# Altium PCB Adafruit MicroLipo Charger v2.PcbDoc
Units mil, origin at the board's own origin, x right, y up, seen from the top; angles counter-clockwise.
Board outline 1195 x 475 mil, 2 copper layers (Top, Bottom); 27 components, 9 nets, 38 pads, 12 vias.
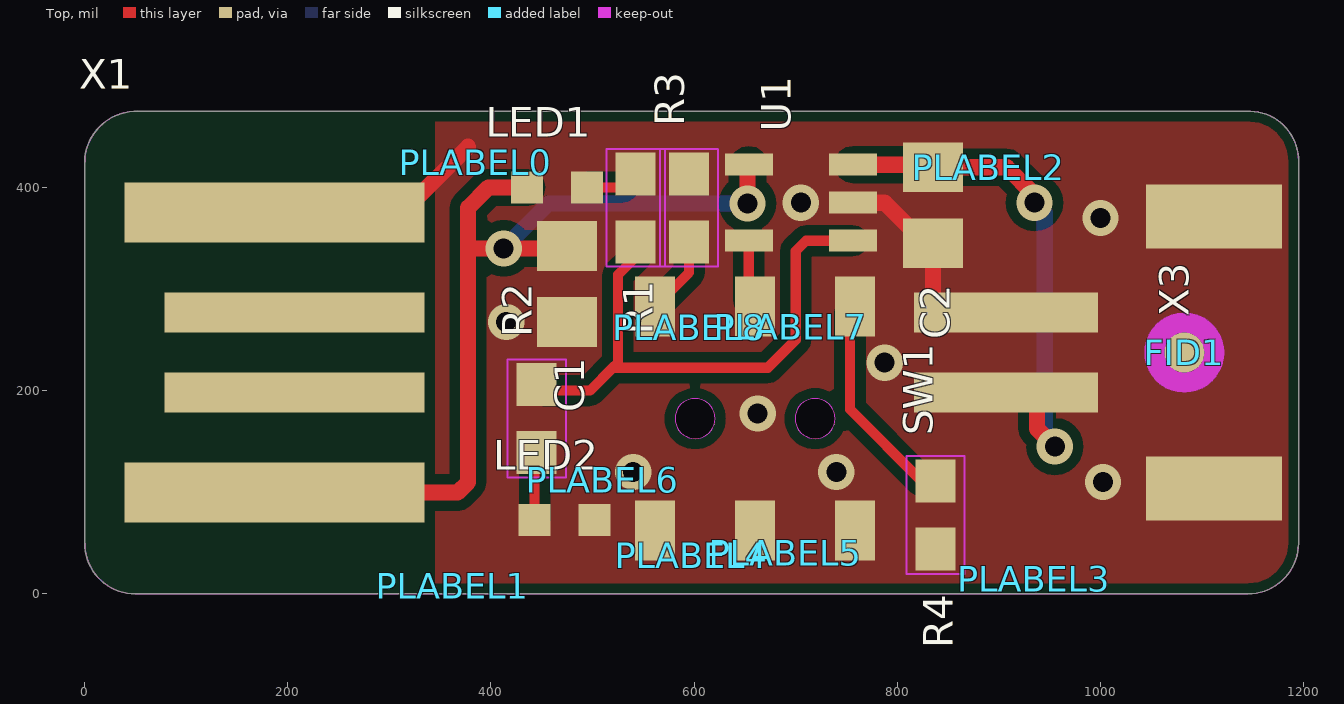
[diagram p0: Top view]
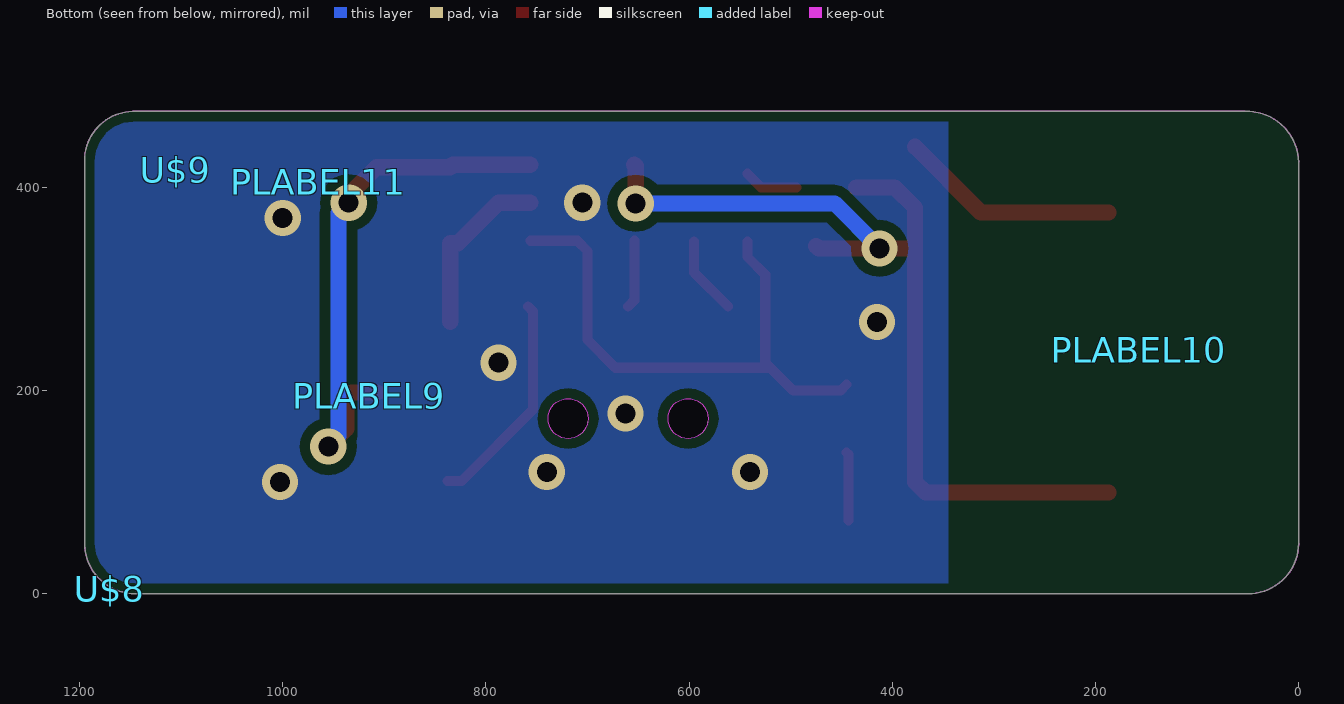
[diagram p1: Bottom view, seen from below]

## Layer stack, top to bottom
Top Solder: solder mask 0.4, Solder Resist, Dk 3.5
Top: signal copper 1.378
Dielectric 1: dielectric 12.6, FR-4, Dk 4.8
Bottom: signal copper 1.378
Bottom Solder: solder mask 0.4, Solder Resist, Dk 3.5

## Board outline
0,50 0,425 cw(c51.25,423.75) 52.5,475 1147.5,475 cw(c1146.25,426.25) 1195,425 1195,50 cw(c1145,50) 1145,0 50,0 cw(c50,50)
cut-out: 719.06,152.81 ccw(c719.06,172.5) 738.75,172.5 ccw(c719.06,172.5) 719.06,192.19 ccw(c719.06,172.5) 699.38,172.5 ccw(c719.06,172.5)
cut-out: 600.94,152.81 ccw(c600.94,172.5) 620.62,172.5 ccw(c600.94,172.5) 600.94,192.19 ccw(c600.94,172.5) 581.25,172.5 ccw(c600.94,172.5)

## Design rules (kind name [scope] priority, off if disabled: settings)
BoardOutlineClearance mdCopperDimension [All] p1: gap=10 ignorepadtopadclearanceinfootprint=FALSE except(0: Arc-SplitContinuation Track-SplitContinuation SMDPad-SplitContinuation THPad-SplitContinuation Via-SplitContinuation Fill-SplitContinuation Poly-SplitContinuation Region-SplitContinuation Text-SplitContinuation)
Clearance Clearance_for_PolygonClass_Isolate_10 [InPolygonClass('Isolate_10') vs IsArc Or IsTrack Or IsPad Or IsVia Or IsFill Or IsRegion Or IsText] p1: gap=10 ignorepadtopadclearanceinfootprint=FALSE
Clearance "Clearance (Same Net)" [All] p2: gap=8 ignorepadtopadclearanceinfootprint=FALSE
Clearance [All] p3: gap=8 ignorepadtopadclearanceinfootprint=FALSE
HoleSize [All] p1: absolutevalues=TRUE maxlimit=100000 minlimit=16 maxpercent=80.000 minpercent=20.000
HoleToHoleClearance mdDrill [All] p1: gap=8 allowstackedmicrovias=TRUE
MinimumSolderMaskSliver [All] p1 off: minsoldermaskwidth=10
PasteMaskExpansion Expansion_SMDPaste_OFF [InPadClass('SMDPaste_OFF')] p1: expansion=0
PasteMaskExpansion mlMinCreamFrame [All] p2: expansion=0
PolygonConnect PolygonConnect_For_PolygonThermal_ON_Width100000_Gap100000 [InPolygonClass('PolygonThermal_ON_Width100000_Gap100000') vs Not IsVia] p1: connectstyle=Relief reliefconductorwidth=10 reliefentries=4 polygonreliefangle="90 Angle" airgapwidth=10
PolygonConnect ThermalVias [IsVia] p2: connectstyle=Direct reliefconductorwidth=10 reliefentries=4 polygonreliefangle="90 Angle" airgapwidth=10
PolygonConnect [All] p3: connectstyle=Relief reliefconductorwidth=10 reliefentries=4 polygonreliefangle="90 Angle" airgapwidth=10
RoutingVias [All] p1: holewidth=16 width=32 viastyle="Through Hole" minholewidth=16 minwidth=32 maxholewidth=100 maxwidth=100
SolderMaskExpansion mlMinStopFrame [All] p1: expansion=4 istentingtop=FALSE
Width [All] p1: maxlimit=10 minlimit=8 preferedwidth=8
26 further rules are at their usual default settings.

## Classes and differential pairs
polygon class PolygonThermal_ON_Width100000_Gap100000: Polygon_1_Net_GND Polygon_2_Net_GND
polygon class Isolate_10: Polygon_1_Net_GND Polygon_2_Net_GND
pad class SMDPaste_OFF: FID1-1 X1-GND X1-USB_NEG X1-USB_PLUS X1-VCC

## Components (designator, comment, footprint, x,y, rotation, side; value= is the part's Value field where it differs from the comment)
C1 "10uF" 0805-NO 475,305 r270 top
C2 "10uF" 0805-NO 835,382.5 r270 top
FID1 "" FIDUCIAL_1MM 1082.5,237.5 r0 top
LED1 "RED" CHIPLED_0603_NOOUTLINE 465,400 r270 top
LED2 "GREEN" CHIPLED_0603_NOOUTLINE 472.5,72.5 r270 top
PLABEL0 "" PLABEL0 385,425 r0 top
PLABEL1 "" PLABEL1 362.5,7.5 r0 top
PLABEL2 "" PLABEL2 890,420 r0 top
PLABEL3 "" PLABEL3 935,15 r0 top
PLABEL4 "" PLABEL4 597.5,37.5 r0 top
PLABEL5 "" PLABEL5 690,40 r0 top
PLABEL6 "" PLABEL6 510,112.5 r90 top
PLABEL7 "" PLABEL7 695,262.5 r0 top
PLABEL8 "" PLABEL8 595,262.5 r0 top
PLABEL9 "" PLABEL9 915,195 r180 bottom
PLABEL10 "" PLABEL10 157.5,240 r90 bottom
PLABEL11 "" PLABEL11 965,405 r180 bottom
R1 "2K" 0603-NO 542.5,380 r270 top
R2 "10K" 0603-NO 445,172.5 r90 top
R3 "10K" 0603-NO 595,380 r90 top
R4 "2K" 0603-NO 837.5,77.5 r270 top
SW1 "DPDT Switch" EG1390 660,172.5 r180 top
U1 "MCP73831T-2ACI/OT" SOT23-5 705,385 r90 top
U$8 "" ADAFRUIT_TEXT_20MM 1170,5 r180 bottom
U$9 "" PCBFEAT-REV-040 1105,417.5 r180 bottom
X1 "PCBUSB" USBA_PCB 195,237.5 r0 top
X3 "CON_JST_PH_2PIN_MT_BATT" JSTPH2_BATT 987.5,237.5 r270 top

## Footprints (in the part's own frame and the unit in brackets; to place one, negate y for a bottom-side part, rotate by r counter-clockwise, add the part's x,y. Pads: shape width x height; smd on the part's side, far side on the other; paste and mask are expansions set on the pad)
0603-NO [mm] "0603-NO"
  rect 1.075x1 smd: 1(-0.85,0) 2(0.85,0)
  Top keep-out lines w0.051: 1.473,-0.729 -1.473,-0.729 -1.473,0.729 1.473,0.729 1.473,-0.729
  body extent -1.5,-0.76 1.5,0.76, height 3.81
0805-NO [mil] "0805-NO"
  rect 48.82x59.06 smd: 1(-37.4,0) 2(37.4,0)
  body extent -62,-30 62,30, height 150
ADAFRUIT_TEXT_20MM [mil] "ADAFRUIT_TEXT_20MM"
CHIPLED_0603_NOOUTLINE [mil] "CHIPLED_0603_NOOUTLINE"
  rect 31.5x31.5 smd: A(0,-29.53) C(0,29.53)
  body extent -18,-45 18,45, height 150
EG1390 [mm] "EG1390"
  rect 1x1.5 smd: O1(-2.5,2.8) O2(-2.5,-2.8) P1(0,2.8) P2(0,-2.8) S1(2.5,2.8) S2(2.5,-2.8)
  body extent -3,-3.55 3,3.55, height 1.27
FIDUCIAL_1MM [mm] "FIDUCIAL_1MM"
  rrect100% 1x1 smd paste+0: 1(0,0)
  Top keep-out lines w0.483: -0.75,0 ccw(c0,0) 0,-0.75 ccw(c0,0) 0.75,0 ccw(c0,0) 0,0.75 ccw(c0,0) -0.75,0
  Top keep-out lines w0.5: -0.75,0 ccw(c0,0) 0,-0.75 ccw(c0,0) 0.75,0 ccw(c0,0) 0,0.75 ccw(c0,0) -0.75,0
  body extent -1.01,-1.01 1.01,1.01, height 3.81
JSTPH2_BATT [mm] "JSTPH2_BATT"
  rect 1x4.6 smd: 1(-1,-2.049) 2(1,-2.049)
  rect 1.6x3.4 smd: NC1(-3.4,3.151) NC2(3.4,3.151)
  body extent -4.2,-4.35 4.2,4.85, height 3.81
PCBFEAT-REV-040 [mil] "PCBFEAT-REV-040"
PLABEL0 [mil] "PLABEL0"
PLABEL1 [mil] "PLABEL1"
PLABEL2 [mil] "PLABEL2"
PLABEL3 [mil] "PLABEL3"
PLABEL4 [mil] "PLABEL4"
PLABEL5 [mil] "PLABEL5"
PLABEL6 [mil] "PLABEL6"
PLABEL7 [mil] "PLABEL7"
PLABEL8 [mil] "PLABEL8"
PLABEL9 [mil] "PLABEL9"
PLABEL10 [mil] "PLABEL10"
PLABEL11 [mil] "PLABEL11"
SOT23-5 [mil] "SOT23-5"
  rect 21.65x47.24 smd: 1(-37.4,-51.19) 2(0,-51.19) 3(37.4,-51.19) 4(37.4,51.19) 5(-37.4,51.19)
  body extent -60,-75 60,75, height 150
USBA_PCB [mm] "USBA_PCB"
  rect 7.5x1.5 smd paste+0: GND(-0.2,3.5) VCC(-0.2,-3.5)
  rect 6.5x1 smd paste+0: USB_NEG(0.3,-1) USB_PLUS(0.3,1)
  body extent -5,-6 3.7,6, height 3.81

## Part data
C1 C2: library part 0805-NO, PackageName=0805-NO
FID1: library part FIDUCIAL_1MM, PackageName=FIDUCIAL_1MM
LED1 LED2: library part CHIPLED_0603_NOOUTLINE, PackageName=CHIPLED_0603_NOOUTLINE
PLABEL0: library part PLABEL0, PackageName=PLABEL0
PLABEL1: library part PLABEL1, PackageName=PLABEL1
PLABEL2: library part PLABEL2, PackageName=PLABEL2
PLABEL3: library part PLABEL3, PackageName=PLABEL3
PLABEL4: library part PLABEL4, PackageName=PLABEL4
PLABEL5: library part PLABEL5, PackageName=PLABEL5
PLABEL6: library part PLABEL6, PackageName=PLABEL6
PLABEL7: library part PLABEL7, PackageName=PLABEL7
PLABEL8: library part PLABEL8, PackageName=PLABEL8
PLABEL9: library part PLABEL9, PackageName=PLABEL9
PLABEL10: library part PLABEL10, PackageName=PLABEL10
PLABEL11: library part PLABEL11, PackageName=PLABEL11
R1 R2 R3 R4: library part 0603-NO, PackageName=0603-NO
SW1: library part EG1390, PackageName=EG1390
U1: library part SOT23-5, PackageName=SOT23-5
U$8: library part ADAFRUIT_TEXT_20MM, PackageName=ADAFRUIT_TEXT_20MM
U$9: library part PCBFEAT-REV-040, PackageName=PCBFEAT-REV-040
X1: library part USBA_PCB, PackageName=USBA_PCB
X3: library part JSTPH2_BATT, PackageName=JSTPH2_BATT

## Free pads (board coordinates)
  round 39.37 hole 39.37 unplated: MH1(600.94,172.5) MH2(719.06,172.5)

## Via types
v1: diameter 35.69/35.69 (per signal layer), hole 19.69, Top to Bottom, 12 vias

## Nets (pads, with @x,y where several pads share a name; then routed paths per layer and width w, separated by ;. In a path a pad name is that pad's centre, name@x,y a point inside that pad or via, vN(x,y) a via of type N, cw(c..) or ccw(c..) an arc to the next point about the centre after c; other vN are vias at no path point)
GND: C1.2 C2.2 LED2.C R3.2 R4.2 SW1.O1 SW1.P1 SW1.S1 U1.2 X1.GND X3.1 X3.NC1 X3.NC2 | length 389.7
  Top w16: X1.GND 312.8,375.3 377.5,440 ; U1.2 787.5,385 827.4,345.1 C2.2 X3.1@835,267.9
  other v1: 1002.5,110 540,120 740,120 662.5,177.5 787.5,227.5 415,267.5 1000,370 705,385
N$1: LED1.C R1.1 | length 53.5
  Top w10: LED1.C 529.04,400 R1.1
N$2: R1.2 R2.2 U1.1 | length 559.4
  Top w10: R2.2 450.96,200 497.5,200 520,222.5 ; R1.2 542.5,331.54 525,314.04 525,227.5 520,222.5 ; U1.1 710.1,347.6 700,337.5 700,250 672.5,222.5 520,222.5
N$3: R3.1 SW1.S2 | length 77.7
  Top w10: SW1.S2 595,316.16 R3.1
N$4: R4.1 SW1.O2 | length 216.6
  Top w10: SW1.O2 753.43,277.74 753.43,181.57 824.04,110.96 R4.1
N$5: SW1.P2 U1.5 | length 67.4
  Top w10: U1.5 653.82,288.92 SW1.P2
N$6: LED2.A R2.1 | length 67.4
  Top w10: LED2.A 442.97,137.01 R2.1
VBAT: C2.1 U1.3 X3.2 | length 534.7
  Top w16: U1.3 832.5,422.4 C2.1 907.6,419.9 935,392.5 v1(935,385) ; X3.2 931.87,198.13 937.5,192.5 937.5,162.5 v1(955,145)
  Bottom w16: v1(935,385) 945,375 945,155 v1(955,145)
VDD: C1.1 LED1.A U1.4 X1.VCC | length 927.4
  Top w16: X1.VCC 367.2,99.7 377.5,110 377.5,342.4 ; LED1.A 397.5,400 377.5,380 377.5,342.4 ; C1.1 472.6,340 v1(412.5,340) 379.9,340 377.5,342.4 ; v1(652.5,384.27) 652.5,421.09 U1.4
  Bottom w16: v1(412.5,340) 456.77,384.27 v1(652.5,384.27)
pads on no net: FID1.1 X1.USB_NEG X1.USB_PLUS

## Polygon pours and split planes (outlines as drawn)
GND on Top "Polygon_1_Net_GND" (solid, remove dead copper, pour order 1): 345,-5 345,480 1200,480 1200,-5
GND on Bottom "Polygon_2_Net_GND" (solid, remove dead copper, pour order 0): 345,480 1200,480 1200,-5 345,-5

## Keep-outs
Keep-Out Layer:
  the board outline again, w0

## Silkscreen, mask and mechanical layers (free items; w line width, h text height)
Dimension:
  the board outline again, w0
bPlace:
  lines w16: 57.5,235 112.5,180 112.5,290 57.5,235
Pinguin_tBackup:
  text "CHG" at 397.5,425 h62
  text "MicroLipo" at 877.5,417.5 h62
  text "1" at 597.5,262.5 h62
  text "5" at 697.5,262.5 h62
  text "Rate" at 457.5,112.5 h62 r90
  text "H" at 690,40 h62
  text "L" at 597.5,37.5 h62
  text "3.7/4.2V" at 890,15 h62
  text "DONE" at 362.5,7.5 h62
Pinguin_bBackup:
  text "Adafruit MicroLipo" at 965,402.5 h93
  text "3.7V/4.2V LiPoly/LiIon" at 922.5,332.5 h69.75
  text "100mA/500mA Rate" at 922.5,265 h69.75
  text "Battery Charger" at 922.5,197.5 h69.75
  text "Plug into USB" at 153.02,-21.3 h77.5 r270

## Dimensions
640,0 to 735,475 on tFinish
0,305 to 350,275 on tFinish
0,305 to 1195,275 on tFinish

## Text inside footprints (layer, text, board x,y; h text height)
U$9: tPlace ">REV" at 1119,397.5 h62
X1: tDocu "PCB Edge" at -55,87.5 h77.5 r90